# Altium PCB PCB Layout.PcbDoc
Units mil, origin at the board's own origin, x right, y up, seen from the top; angles counter-clockwise.
Board outline 1630 x 775 mil, 2 copper layers (Top Layer, Bottom Layer); 11 components, 16 nets, 61 pads, 8 vias.
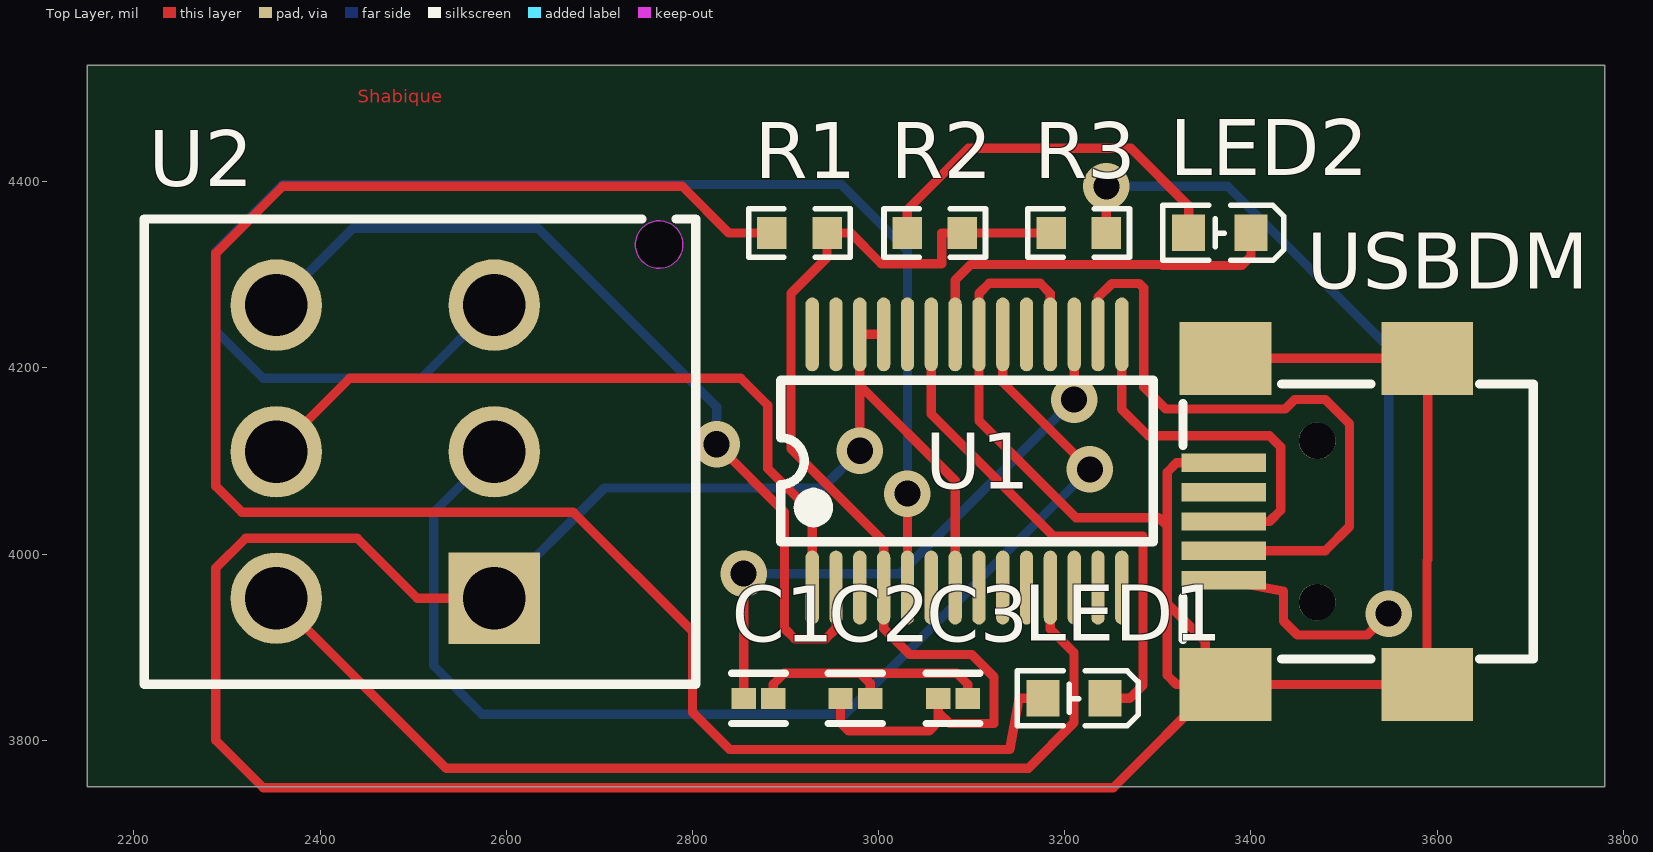
[diagram p0: Top Layer view]
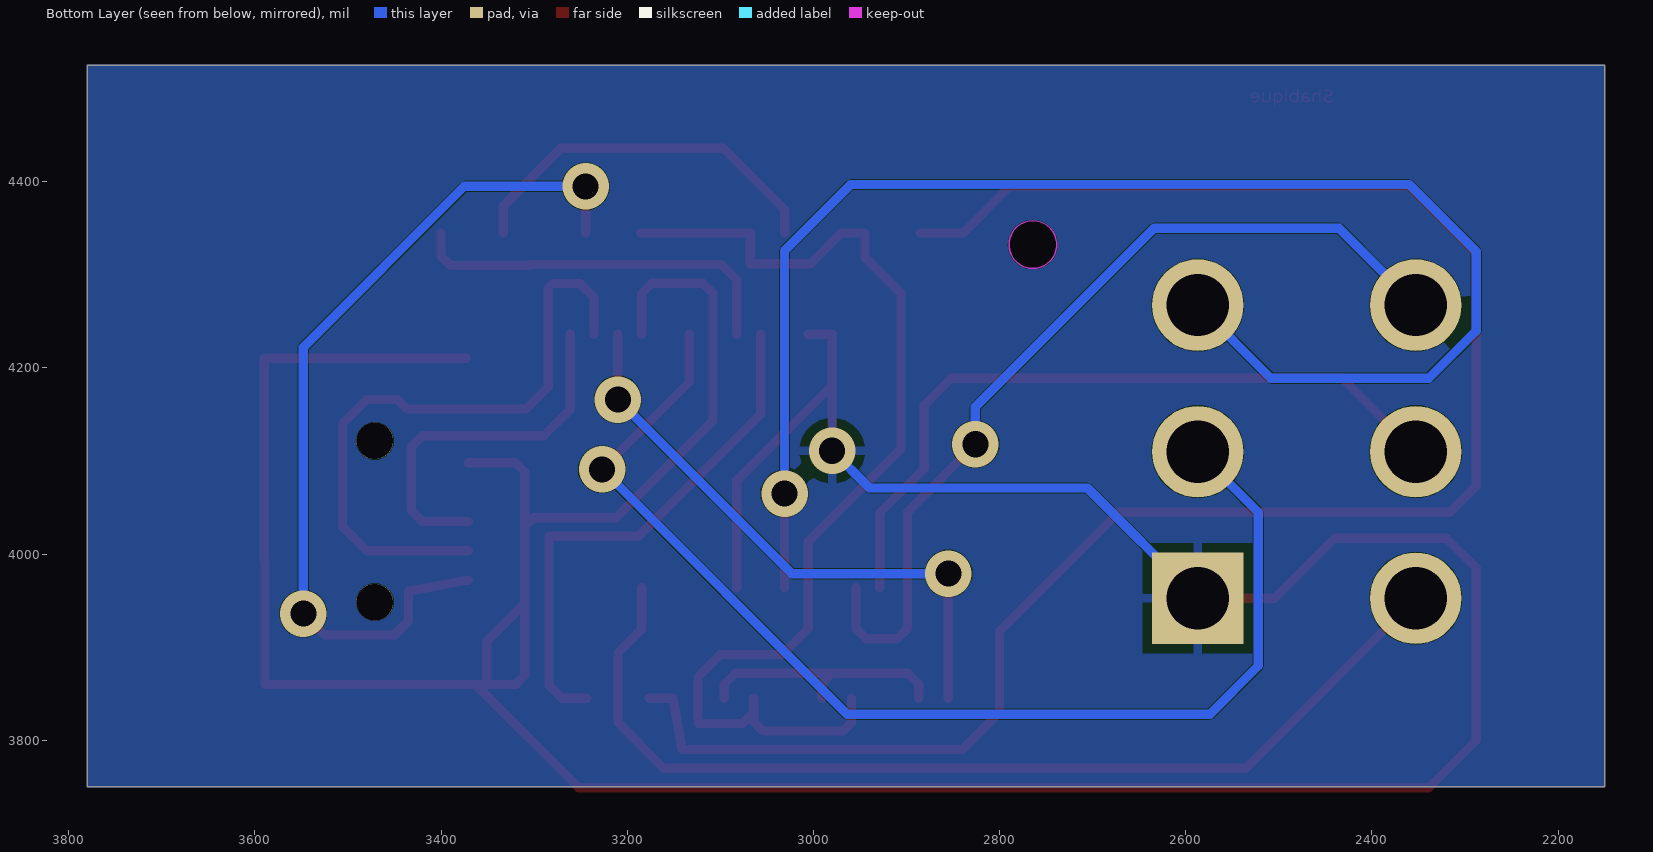
[diagram p1: Bottom Layer view, seen from below]

## Layer stack, top to bottom
Top Solder: solder mask 0.4, Solder Resist, Dk 3.5
Top Layer: signal copper 1.4
Dielectric 1: dielectric 12.6, FR-4, Dk 4.8
Bottom Layer: signal copper 1.4
Bottom Solder: solder mask 0.4, Solder Resist, Dk 3.5

## Board outline
2150,3750 3780,3750 3780,4525 2150,4525

## Design rules (kind name [scope] priority, off if disabled: settings)
Clearance [All] p1: gap=0.4 ignorepadtopadclearanceinfootprint=FALSE
PolygonConnect [All] p1: connectstyle=Relief reliefconductorwidth=10 reliefentries=4 polygonreliefangle="90 Angle" airgapwidth=10
RoutingVias [All] p1: holewidth=28 width=50 viastyle="Through Hole" minholewidth=28 minwidth=50 maxholewidth=28 maxwidth=50
SolderMaskExpansion [All] p1: expansion=4 istentingtop=FALSE
SupplyNets "Schematic Supply Nets" [InNet('GND')] p1: voltage=0.000
Width [All] p1: maxlimit=10 minlimit=10 preferedwidth=10
30 further rules are at their usual default settings.

## Components (designator, comment, footprint, x,y, rotation, side; value= is the part's Value field where it differs from the comment)
C1 "0.1uF" FP-C0402-BB-IPC_B 2870.89,3845 r0 top value="0.10 μF"
C2 "0.1uF" FP-C0402-BB-IPC_B 2975,3845 r0 top value="0.10 μF"
C3 "0.1uF" FP-C0402-BB-IPC_B 3080,3845 r0 top value="0.10 μF"
LED1 "YLED0603R" LED0603-FD 3210,3845 r0 top
LED2 "YLED0603R" LED0603-FD 3366.53,4345 r0 top
R1 "1kΩ" R0603 2915,4345 r0 top value=10kΩ
R2 "1kΩ" R0603 3060.34,4345 r0 top value=10kΩ
R3 "10kΩ" R0603 3215,4345 r0 top
U1 "FT232RL-REEL" SSOP-28_L10.2-W5.3-P0.65-LS7.8-BL 3095,4100 r0 top
U2 "B06B-PSILE-1(LF)(SN)" CONN-TH_6P-P4.00_JST_B06B-PSILE-1-LF-SN 2470,4110 r90 top
USBDM "KH-MINI-SMT-5P-CU" MINI-USB-SMD_KH-MINI-SMT-5P-CU 3480,4035 r90 top

## Footprints (in the part's own frame and the unit in brackets; to place one, negate y for a bottom-side part, rotate by r counter-clockwise, add the part's x,y. Pads: shape width x height; smd on the part's side, far side on the other; paste and mask are expansions set on the pad)
CONN-TH_6P-P4.00_JST_B06B-PSILE-1-LF-SN [mm]
  rect 2.5x2.5 hole 1.7 paste-2539.97 mask+0.05: 1(-4,-2.975)
  round 2.5 hole 1.7 paste-2539.97 mask+0.05: 2(-4,2.975) 3(0,-2.975) 4(0,2.975) 5(4,-2.975) 6(4,2.975)
  Keep-Out Layer board cut-out: 6.3,-7.475 6.236,-7.757 6.055,-7.983 5.795,-8.109 5.505,-8.109 5.245,-7.983 5.064,-7.757 5,-7.475 5,-7.475 5.064,-7.193 5.245,-6.967 5.505,-6.841 5.795,-6.841 6.055,-6.967 6.236,-7.193 6.3,-7.475
  Keep-Out Layer circle w0.025: c5.65,-7.475 r0.65
  Keep-Out Layer region: 6.3,-7.475 6.236,-7.757 6.055,-7.983 5.795,-8.109 5.505,-8.109 5.245,-7.983 5.064,-7.757 5,-7.475 5,-7.475 5.064,-7.193 5.245,-6.967 5.505,-6.841 5.795,-6.841 6.055,-6.967 6.236,-7.193 6.3,-7.475
  silkscreen extent -6.35,-8.48 6.35,6.57
FP-C0402-BB-IPC_B [mil]
  rect 26.19x22.54 smd paste+0 mask+0: 1(-15.89,0) 2(15.89,0)
  silkscreen extent -29,-27 29,27, body extent -35,-17 35,17, height 10
LED0603-FD [mm]
  rect 0.9x1 smd: 1(-0.85,0) 2(0.85,0)
  silkscreen extent -1.55,-0.75 1.75,0.75
MINI-USB-SMD_KH-MINI-SMT-5P-CU [mm]
  rect 0.5x2.3 smd paste+0 mask+0.05: 1(-1.6,2.775) 2(-0.8,2.775) 3(0,2.775) 4(0.8,2.775) 5(1.6,2.775)
  rect 2x2.5 smd paste+0 mask+0.05: 6(-4.45,-2.775) 7(-4.45,2.725) 8(4.45,-2.775) 9(4.45,2.725)
  round 1 hole 1 unplated paste-2539.97: ""(-2.2,0.225) ""(2.2,0.225)
  silkscreen extent -3.75,-5.67 3.75,3.89
R0603 [mil]
  rect 31.75x34.02 smd paste-3937.01 mask+2: 1(-29.66,0) 2(29.66,0)
  silkscreen extent -55,-26 55,26
SSOP-28_L10.2-W5.3-P0.65-LS7.8-BL [mil]
  oval 14.33x79.35 smd: 1(-166.34,-136.03) 2(-140.75,-136.03) 3(-115.16,-136.03) 4(-89.57,-136.03) 5(-63.98,-136.03) 6(-38.39,-136.03) 7(-12.79,-136.03) 8(12.8,-136.03) 9(38.39,-136.03) 10(63.98,-136.03) 11(89.57,-136.03) 12(115.16,-136.03) 13(140.75,-136.03) 14(166.34,-136.03) 15(166.34,136.03) 16(140.75,136.03) 17(115.16,136.03) 18(89.57,136.03) 19(63.98,136.03) 20(38.39,136.03) 21(12.8,136.03) 22(-12.79,136.03) 23(-38.39,136.03) 24(-63.98,136.03) 25(-89.57,136.03) 26(-115.16,136.03) 27(-140.75,136.03) 28(-166.34,136.03)
  silkscreen extent -200,-87 200,87

## Part data
C1 C2 C3: library part CMP-2008-02046-2, "CAP CER 0.1UF 10V X5R 0402", Capacitance="0.10 μF", Manufacturer=Kemet, Manufacturer Part Number=C0402C104K8PACTU, Package=C0402-BB, Temperature="-55°C to +125°C", Temperature Characteristic=X5R, Temperature Coefficient=15%, Temperature Range High=+125°C, Temperature Range Low=-55°C, Tolerance=0.1, Voltage Rating="10 V", Automotive=No, Category=Cap, ComponentLink2Description=Datasheet, ComponentLink2URL=https://content.kemet.com/datasheets/KEM_C1002_X7R_SMD.pdf, Device Class L1="Passive Components", Device Class L2=Capacitors, Device Class L3="Ceramic Capacitors", Digikey Description="CAP CER 0.1UF 10V X5R 0402", Height=0.55mm, Ipc Land Pattern Name=CAPC10050X50, Lead Free=Yes, Material=Ceramic, Mouser Description="Capacitor 100 nF 10 VDC 0402 [] KEMET C0402C104K8PACTU (Capacitor 100 nF 10 VDC 0402 Ceramic Capacitors).", Octopart=https://octopart.com/c0402c104k8pactu-kemet-140039, RoHS=TRUE
LED1 LED2: Color Temperature=-, Emitted Color=Red, Forward Current=25mA, Forward Voltage (VF)=1.8V~2.4V, JLCPCB Part Class="Extended Part", Manufacturer=YONGYUTAI(永裕泰), Operating Temperature=-40℃~+85℃, Add into BOM=yes, Convert to PCB=yes, Datasheet=https://atta.szlcsc.com/upload/public/pdf/source/20231027/FB19AF06E2C70028E58AB5CEDD1BDC72.pdf, Device=YLED0603R, Diode Configuration=-, Dominant Wavelength=620nm~625nm, LCSC Part Name=YLED0603R, Lens Color=-, Luminous Intensity=-, Manufacturer Part=YLED0603R, Mounting Sytle=-, Peak Wavelength=-, Power Dissipation=-, Supplier=LCSC, Supplier Footprint=0603, Supplier Part=C19171390, Symbol=YLED0603R, Viewing Angle=-
R1 R2 R3: library part RC0603FR-0710KL, JLCPCB Part Class="Extended Part", LCSC Part Name="厚膜电阻 10kΩ ±1% 100mW", Manufacturer=YAGEO(国巨), Operating Temperature Range=-55℃~+155℃, Temperature Coefficient=±100ppm/℃, Tolerance=±1%, Add into BOM=yes, Convert to PCB=yes, Datasheet=https://atta.szlcsc.com/upload/public/pdf/source/20180927/C295883_E8D83085EA81BD7DE0B2B681138C15EE.pdf, Device=RC0603FR-0710KL, Manufacturer Part=RC0603FR-0710KL, Supplier=LCSC, Supplier Footprint=0603, Supplier Part=C98220, Symbol=RC0603FR-0710KL, Type="Thick Film Resistors"
U1: JLCPCB Part Class="Extended Part", LCSC Part Name="FT232R USB UART 芯片", Manufacturer=FTDI(飞特帝亚), Operating Temperature=-40℃~+85℃, Supply Voltage=3.3V~5.25V, Add into BOM=yes, Applications Function="USB to UART", Convert to PCB=yes, Datasheet=https://atta.szlcsc.com/upload/public/pdf/source/20130221/1457706592200.pdf, Device=FT232RL-REEL, Manufacturer Part=FT232RL-REEL, Supplier=LCSC, Supplier Footprint=SSOP-28-208mil, Supplier Part=C8690, Symbol=FT232RL-REEL
U2: JLCPCB Part Class="Extended Part", Manufacturer=JST, Add into BOM=yes, Convert to PCB=yes, Datasheet=https://atta.szlcsc.com/upload/public/pdf/source/20220125/269FDD7CCCA7D6F7CD97DE92C25BFCB0.pdf, Device=B06B-PSILE-1(LF)(SN), LCSC Part Name=B06B-PSILE-1(LF)(SN), Manufacturer Part=B06B-PSILE-1(LF)(SN), Supplier=LCSC, Supplier Footprint=-, Supplier Part=C5305924, Symbol=B06B-PSILE-1(LF)(SN)
USBDM: JLCPCB Part Class="Extended Part", Manufacturer=kinghelm(金航标), Manufacturer Part=KH-MINI-SMT-5P-Cu, Contributor=LCSC, spicePre=U, spiceSymbolName=KH-MINI-SMT-5P-CU, Supplier=LCSC, Supplier Part=C2688795

## Via types
v1: diameter 50, hole 28, Top Layer to Bottom Layer, 8 vias

## Nets (pads, with @x,y where several pads share a name; then routed paths per layer and width w, separated by ;. In a path a pad name is that pad's centre, name@x,y a point inside that pad or via, vN(x,y) a via of type N, cw(c..) or ccw(c..) an arc to the next point about the centre after c; other vN are vias at no path point)
+3v3: C1.1 U1.17 | length 636.6
  Top Layer w10: C1.1 v1(2855,3979) ; v1(3210.16,4166) U1.17
  Bottom Layer w10: v1(2855,3979) 3023.16,3979 v1(3210.16,4166)
+5V0: C2.1 C3.1 R1.2 R2.2 R3.1 U1.4 | length 1188.5
  Top Layer w10: C2.1 2959.11,3818.89 2968,3810 3054.11,3810 3064.11,3820 3064.11,3830 ; C3.1 3064.11,3830 ; R3.1 R2.2 3067.8,4345 3067.8,4312 3003,4312 2970,4345 R1.2 2944.66,4318.66 2906,4280 2906,4113 3005.43,4013.57 U1.4 3005.43,3920 3033.43,3892 3100,3892 3124,3868 3124,3818 3076.11,3818 3064.11,3830
CTS: U1.11 U2.2 | length 1108.5
  Top Layer w10: U2.2 2535.39,3770 3161,3770 3210,3819 3210,3894 3184.57,3919.43 U1.11
DTR: U1.2 U2.6 | length 963.4
  Top Layer w10: v1(2826,4118) 2899,4045 2899,3920 2910,3909 2943.25,3909 2954.25,3920 U1.2
  Bottom Layer w10: U2.6 2435.39,4350 2634,4350 2826,4158 v1(2826,4118)
GND: U1.7 U1.18 U1.21 U1.25 U1.26 U2.1 USBDM.5 USBDM.6 USBDM.7 USBDM.8 USBDM.9 | length 4289.3
  Top Layer w10: U2.1 2504.48,3952.52 2440,4017 2320,4017 2288,3985 2288,3800 2339,3749 3252.2,3749 USBDM.7@3363,3859.8 ; v1(2979.84,4111) 2979.84,4181.37 ; U1.25 U1.26 2979.84,4181.37 ; U1.7 3082.21,4079 2979.84,4181.37 ; U1.18 3184.57,4280 3173.57,4291 3118.8,4291 3107.8,4280 U1.21 3107.8,4143.2 3212,4039 3300.83,4039 3310,4029.83 ; USBDM.5 3320,4097.99 3310,4087.99 3310,4029.83 ; USBDM.9 USBDM.8 3590,4210.2 3590,3994 3589.25,3993.25 USBDM.6 USBDM.7 USBDM.7@3363,3859.8 ; 3310,3947 3310,4029.83 ; 3310,3947 3310,3869.8 3320,3859.8 USBDM.7@3351,3859.8 ; 3310,3947 3351,3906 USBDM.7@3351,3859.8 ; USBDM.7@3351,3859.8 USBDM.7@3363,3859.8
  Bottom Layer w10: U2.1 2705.61,4071 2939.84,4071 v1(2979.84,4111)
NetC1_2: C1.2 C2.2 C3.2 | length 280.6
  Top Layer w10: C1.2 2886.78,3860 2898.78,3872 2980,3872 ; C2.2 2990.89,3861.11 2980,3872 ; C3.2 3095.89,3860 3083.89,3872 2980,3872
NetLED1_1: LED1.1 R1.1 | length 2000.5
  Top Layer w10: R1.1 2839,4345 2789,4395 2360,4395 2288,4323 2288,4073 2316,4045 2672,4045 2800,3917 2800,3830 2840,3790 3141,3790 3151,3845 LED1.1
NetLED2_1: LED2.1 R2.1 | length 409.3
  Top Layer w10: R2.1 3030.68,4370 3096.56,4435.88 3271.12,4435.88 3333.07,4373.93 LED2.1
NetR3_2: R3.2 USBDM.1 | length 937.1
  Top Layer w10: R3.2 v1(3244.66,4395) ; USBDM.1 3435,3960 3435,3928 3450,3913 3525,3913 v1(3548,3936)
  Bottom Layer w10: v1(3244.66,4395) 3375,4395 3548,4222 v1(3548,3936)
RXD: U1.5 U2.5 | length 1602
  Top Layer w10: U1.5 v1(3031.02,4065.02)
  Bottom Layer w10: U2.5 2508.65,4189 2339,4189 2288,4240 2288,4325 2360,4397 2960,4397 3031.02,4325.98 v1(3031.02,4065.02)
RXLED: LED2.2 U1.22 | length 412.5
  Top Layer w10: U1.22 3082.21,4294.21 3099,4311 3304,4311 3305,4310 3390,4310 3400,4320 LED2.2
TXD: U1.1 U2.4 | length 788.6
  Top Layer w10: U2.4 2431.87,4189 2852,4189 2881,4160 2881,4092 2928.66,4044.34 U1.1
TXLED: LED1.2 U1.23 | length 573.8
  Top Layer w10: U1.23 3056.61,4150.39 3188,4019 3284,4019 3284,3859 3270,3845 LED1.2
USBDM: U1.16 USBDM.2 | length 705.8
  Top Layer w10: U1.16 3235.75,4275.75 3250.71,4290.71 3279.96,4290.71 3284.93,4285.74 3284.93,4179.4 3308.5,4155.83 3437,4155.83 3447.17,4166 3480,4166 3506,4140 3506,4029.5 3480,4003.5 USBDM.2
USBDP: U1.15 USBDM.3 | length 402.2
  Top Layer w10: U1.15 3261.34,4155.42 3289.76,4127 3420,4127 3432,4115 3432,4047 3420,4035 USBDM.3
VCC: U1.20 U2.3 | length 1276.3
  Top Layer w10: U1.20 3133.39,4184.61 v1(3227,4091)
  Bottom Layer w10: U2.3 2522,4044.87 2522,3880 2574,3828 2964,3828 v1(3227,4091)
pads on no net: U1.3 U1.6 U1.8 U1.9 U1.10 U1.12 U1.13 U1.14 U1.19 U1.24 U1.27 U1.28 USBDM. USBDM.4

## Polygon pours and split planes (outlines as drawn)
GND on Bottom Layer "GND_L02_P003" (solid, pour order 3): 2150,4525 3780,4525 3780,3750 2150,3750
no net on Bottom Layer "NONET_L02_P002" (solid, shelved, pour order 2): 2150,4525 3780,4525 3780,3750 2150,3750

## Other copper
Top Layer:
  text "Shabique" at 2440.3,4484.97 h14